# Altium PCB PCB1.PcbDoc
Units mm, origin at the board's own origin, x right, y up, seen from the top; angles counter-clockwise.
Board outline 27.05 x 25 mm, 2 copper layers (Top Layer, Bottom Layer); 12 components, 12 nets, 43 pads, 12 vias.
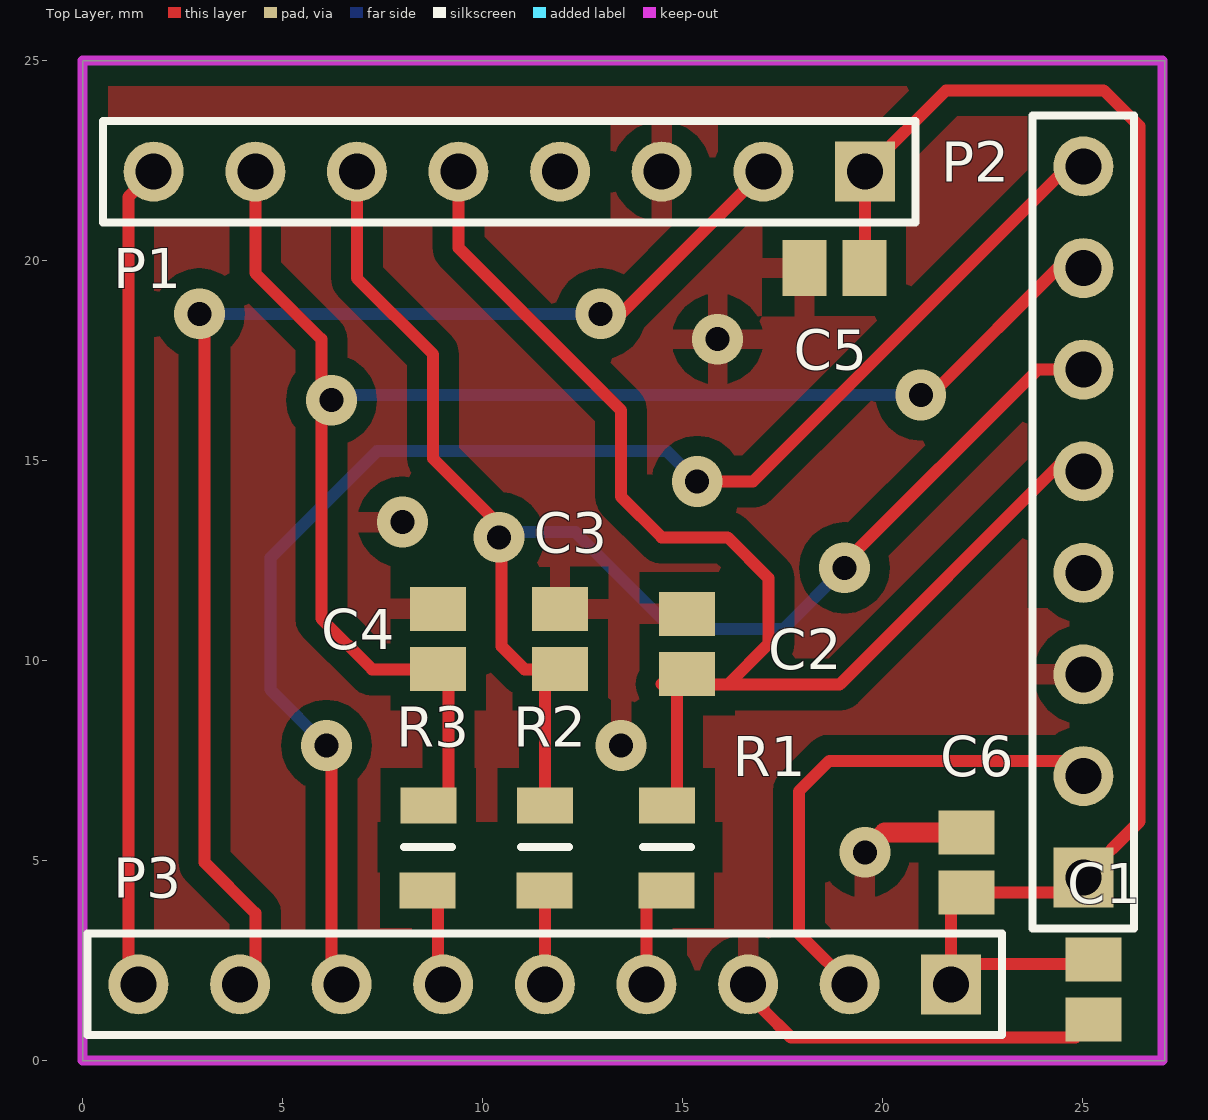
[diagram p0: Top Layer view]
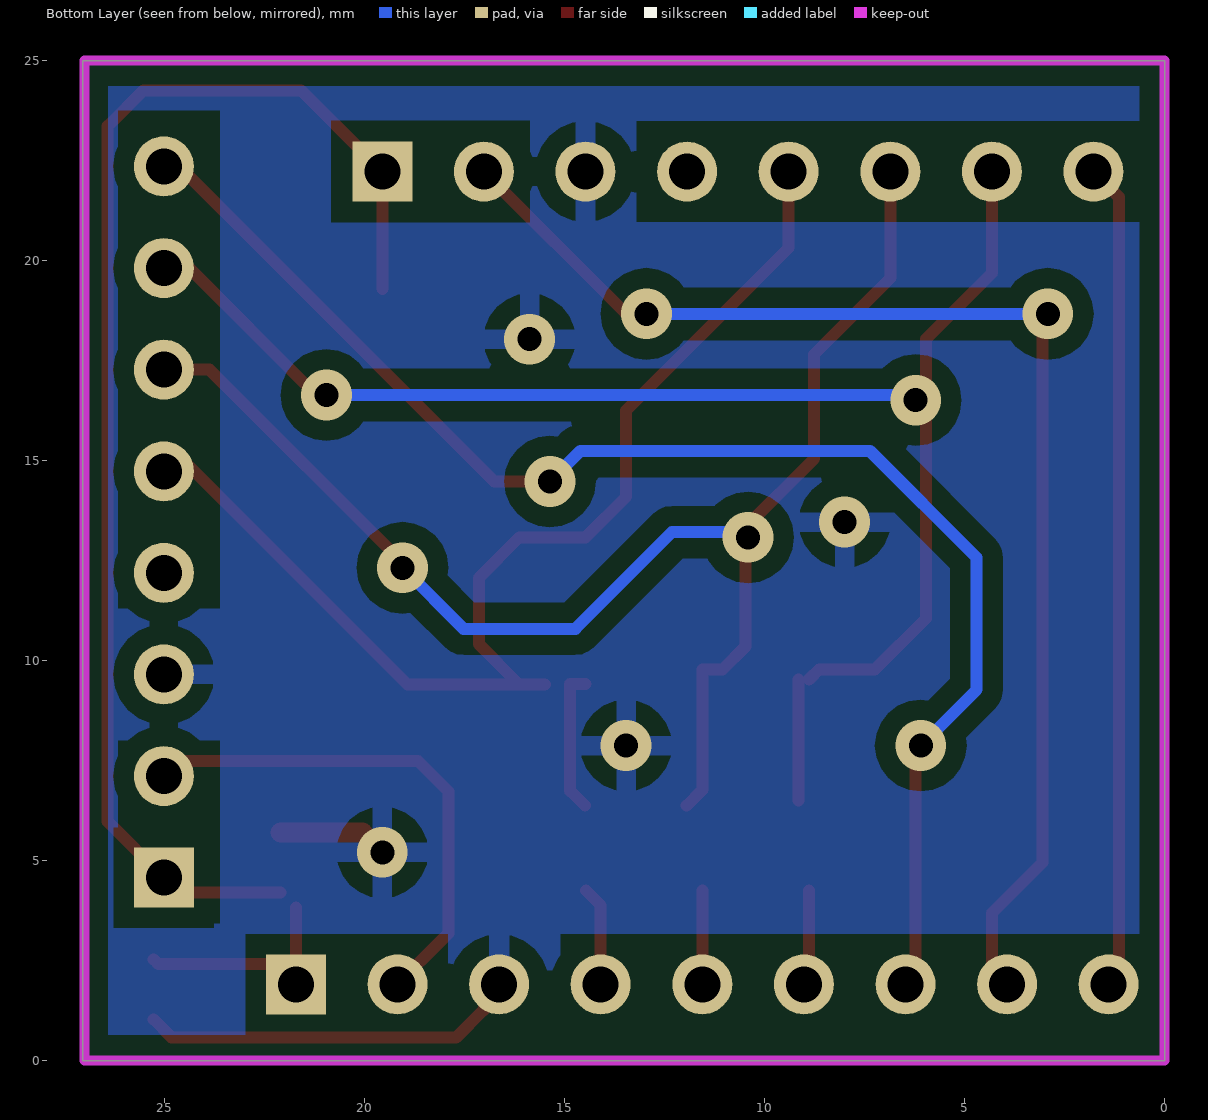
[diagram p1: Bottom Layer view, seen from below]

## Layer stack, top to bottom
Top Solder: solder mask 0.0102, Solder Resist, Dk 3.5
Top Layer: signal copper 0.0356
Dielectric 1: dielectric 0.32, FR-4, Dk 4.8
Bottom Layer: signal copper 0.0356
Bottom Solder: solder mask 0.0102, Solder Resist, Dk 3.5

## Board outline
0,0 0,25 27.051,25 27.051,0

## Design rules (kind name [scope] priority, off if disabled: settings)
Clearance [All] p1: gap=0.3
PlaneConnect [All] p1: planeconnectstyle=Relief reliefexpansion=0.5 reliefentries=4 reliefconductorwidth=0.5 reliefairgap=0.5
PolygonConnect [All] p1: connectstyle=Relief reliefconductorwidth=0.5 reliefentries=4 polygonreliefangle="90 Angle" airgapwidth=0.5
RoutingVias [All] p1: holewidth=0.6 width=1.5 viastyle="Through Hole" minholewidth=0.6 minwidth=1.27 maxholewidth=0.9 maxwidth=1.6
SolderMaskExpansion [All] p1: expansion=0.102
Width [All] p1: maxlimit=0.5 minlimit=0.3 preferedwidth=0.3
28 further rules are at their usual default settings.

## Components (designator, comment, footprint, x,y, rotation, side; value= is the part's Value field where it differs from the comment)
C1 "Cap" C0805 25.273,1.778 r90 top
C2 "Cap" C0805 15.113,10.414 r270 top
C3 "Cap" C0805 11.938,10.541 r90 top
C4 "Cap" C0805 8.89,10.541 r90 top
C5 "Cap" C0805 18.796,19.812 r0 top
C6 "Cap" C0805 22.098,4.953 r270 top
P1 "Header 8" HDR1X8 19.558,22.225 r180 top
P2 "Header 8" HDR1X8 25.019,4.572 r90 top
P3 "Header 9" HDR1X9 21.717,1.905 r180 top
R1 "Res2" 6-0805_N 14.605,5.334 r270 top
R2 "Res2" 6-0805_N 11.557,5.334 r270 top
R3 "Res2" 6-0805_N 8.636,5.334 r270 top

## Footprints (in the part's own frame and the unit in brackets; to place one, negate y for a bottom-side part, rotate by r counter-clockwise, add the part's x,y. Pads: shape width x height; smd on the part's side, far side on the other; paste and mask are expansions set on the pad)
6-0805_N [mm] "Chip Resistor, Body 2.0x1.2mm, IPC Medium Density"
  rect 0.9x1.4 smd: 1(-1.039,0.009) 2(1.078,-0.007)
  silkscreen extent 0,-0.6 0,0.6, body extent -1.07,-0.7 1.07,0.7, height 0.7
C0805 [mm]
  rect 1.1x1.4 smd: 1(-0.75,0) 2(0.75,0)
  body extent -1.1,-0.72 1.1,0.72, height 1.4
HDR1X8 [mm] "Connector; Header; 8 Position"
  rect 1.5x1.5 hole 0.9: 1(0,0)
  round 1.5 hole 0.9: 2(2.54,0) 3(5.08,0) 4(7.62,0) 5(10.16,0) 6(12.7,0) 7(15.24,0) 8(17.78,0)
  silkscreen extent -1.27,-1.27 19.05,1.27
HDR1X9 [mm] "Connector; Header; 9 Position"
  rect 1.5x1.5 hole 0.9: 1(0,0)
  round 1.5 hole 0.9: 2(2.54,0) 3(5.08,0) 4(7.62,0) 5(10.16,0) 6(12.7,0) 7(15.24,0) 8(17.78,0) 9(20.32,0)
  silkscreen extent -1.27,-1.27 21.59,1.27

## Part data
C1 C2 C3 C4 C5 C6: "Capacitor"
P1 P2: "Header, 8-Pin"
P3: "Header, 9-Pin"
R1 R2 R3: "Resistor"

## Via types
v1: diameter 1.27, hole 0.6, Top Layer to Bottom Layer, 12 vias

## Nets (pads, with @x,y where several pads share a name; then routed paths per layer and width w, separated by ;. In a path a pad name is that pad's centre, name@x,y a point inside that pad or via, vN(x,y) a via of type N, cw(c..) or ccw(c..) an arc to the next point about the centre after c; other vN are vias at no path point)
3.3V: C1.2 C5.2 C6.2 P1.1 P2.1 P3.1 | length 39.5
  Top Layer w0.3: C5.2@19.558,19.292 P1.1 21.59,24.257 25.527,24.257 26.423,23.361 26.423,5.976 P2.1 ; P3.1 C6.2@21.717,3.822 ; P3.1@22.098,1.778 22.098,2.413 25.158,2.413 C1.2 ; C6.2 24.777,4.203 P2.1@25.273,4.699
GND: C1.1 C2.1 C3.2 C4.2 C5.1 C6.1 P1.3 P2.3 P3.3 | length 12.1
  Top Layer w0.3: v1@13.208,8.001 v1@13.288,8.081 ; P3.3@17.018,1.778 17.018,1.27 17.711,0.577 24.822,0.577 C1.1
  Top Layer w0.5: v1(19.558,5.207) 20.054,5.703 C6.1
  other v1: 13.462,7.874 8.001,13.462 15.875,18.034
MISO: C2.2 P1.5 P2.5 R1.1 | length 33
  Top Layer w0.3: P1.5 9.398,20.32 13.462,16.256 13.462,14.097 14.478,13.081 16.129,13.081 17.145,12.065 17.145,10.414 16.129,9.398 ; C2.2@14.478,9.41 14.859,9.41 14.859,6.745 R1.1@14.487,6.373 ; C2.2@15.494,9.398 16.129,9.398 ; 18.923,9.398 16.129,9.398 ; 18.935,9.41 24.384,14.859 P2.5@25.273,14.859
MOSI: C3.1 P1.6 P2.6 R2.1 | length 36.9
  Top Layer w0.3: P1.6 6.858,19.558 8.763,17.653 8.763,15.05 10.477,13.335 10.477,10.351 11.049,9.779 11.557,9.779 11.557,6.763 R2.1@11.947,6.373 ; v1@18.986,12.383 23.876,17.272 25.146,17.272 P2.6@25.273,17.399
  Bottom Layer w0.3: v1@10.477,12.954 10.731,13.208 12.319,13.208 14.732,10.795 17.526,10.795 v1(19.05,12.319)
  other v1: 10.414,13.081
NetP3_4: P3.4 R1.2 | length 2.8
  Top Layer w0.3: R1.2@14.471,4.256 14.097,3.882 14.097,2.159 P3.4@14.478,1.778
NetP3_5: P3.5 R2.2 | length 2.5
  Top Layer w0.3: P3.5@11.557,1.778 R2.2@11.557,4.249
NetP3_6: P3.6 R3.2 | length 2.5
  Top Layer w0.3: P3.6@8.89,1.778 R3.2@8.89,4.249
RST1: P2.2 P3.2 | length 13.6
  Top Layer w0.3: P3.2@19.558,1.778 19.304,1.778 17.907,3.175 17.907,6.731 18.669,7.493 24.892,7.493 25.146,7.239 P2.2@25.273,7.239
RST2: P1.2 P3.8 | length 32
  Top Layer w0.3: v1@3.175,18.288 3.048,18.161 3.048,4.953 4.318,3.683 P3.8@4.318,1.778 ; v1(12.954,18.669) 13.462,18.669 P1.2
  Bottom Layer w0.3: 3.556,18.669 v1(12.954,18.669)
  other v1: 2.921,18.669
SCK: C4.1 P1.7 P2.7 R3.1 | length 39.2
  Top Layer w0.3: P1.7 4.318,19.685 5.969,18.034 v1@5.969,16.51 ; v1(6.223,16.51) v1@5.969,16.51 ; C4.1@8.89,9.525 8.636,9.779 7.239,9.779 5.969,11.049 v1@5.969,16.51 ; R3.1@9.153,6.5 C4.1@9.153,9.528 ; v1(20.955,16.637) 21.209,16.637 24.511,19.939 P2.7@25.273,19.939
  Bottom Layer w0.3: v1(6.223,16.51) 6.35,16.637 v1(20.955,16.637)
SS1: P2.8 P3.7 | length 36.7
  Top Layer w0.3: P3.7@6.223,1.651 v1@6.223,7.747 ; v1(15.367,14.478) 16.764,14.478 24.765,22.479 P2.8@25.273,22.479
  Bottom Layer w0.3: v1(6.096,7.874) 4.699,9.271 4.699,12.573 7.366,15.24 14.605,15.24 v1(15.367,14.478)
SS2: P1.8 P3.9 | length 20.8
  Top Layer w0.3: P3.9@1.143,1.651 1.143,21.59 P1.8
pads on no net: P1.4 P2.4

## Polygon pours and split planes (outlines as drawn)
GND on Top Layer "Bottom Layer-No Net" (solid, pour order 4): 0,25 27.051,25 27.051,0 0.254,0 0.127,-0.127 0,0
GND on Bottom Layer "Bottom Layer-No Net" (solid, pour order 2): 0,25 27.051,25 27.051,0 0,0

## Keep-outs
Keep-Out Layer:
  lines w0.254: 0,0 0,25 27,25 27,0 0,0

## Other copper
Top Layer:
  pour cut-out: 7.366,5.969 16.002,5.969 16.002,4.699 7.366,4.699
Multi-Layer:
  pour cut-out: 23.622,8.001 26.162,8.001 26.162,3.429 23.622,3.429
  pour cut-out: 23.622,23.749 26.162,23.749 26.162,11.303 23.622,11.303
  pour cut-out: 0.127,3.175 15.113,3.175 15.113,0.635 0.127,0.635
  pour cut-out: 17.907,3.175 22.987,3.175 22.987,0.635 17.907,0.635
  pour cut-out: 0.508,23.495 13.208,23.495 13.208,20.955 0.508,20.955
  pour cut-out: 15.875,23.495 15.875,20.955 20.828,20.955 20.828,23.495